# Altium PCB LCL_Filter.PcbDoc
Units mm, origin at the board's own origin, x right, y up, seen from the top; angles counter-clockwise.
Board outline 111.25 x 84.33 mm, 2 copper layers (Top Layer, Bottom Layer), stack 1.639 mm thick; 18 components, 6 nets, 32 pads, 0 vias.
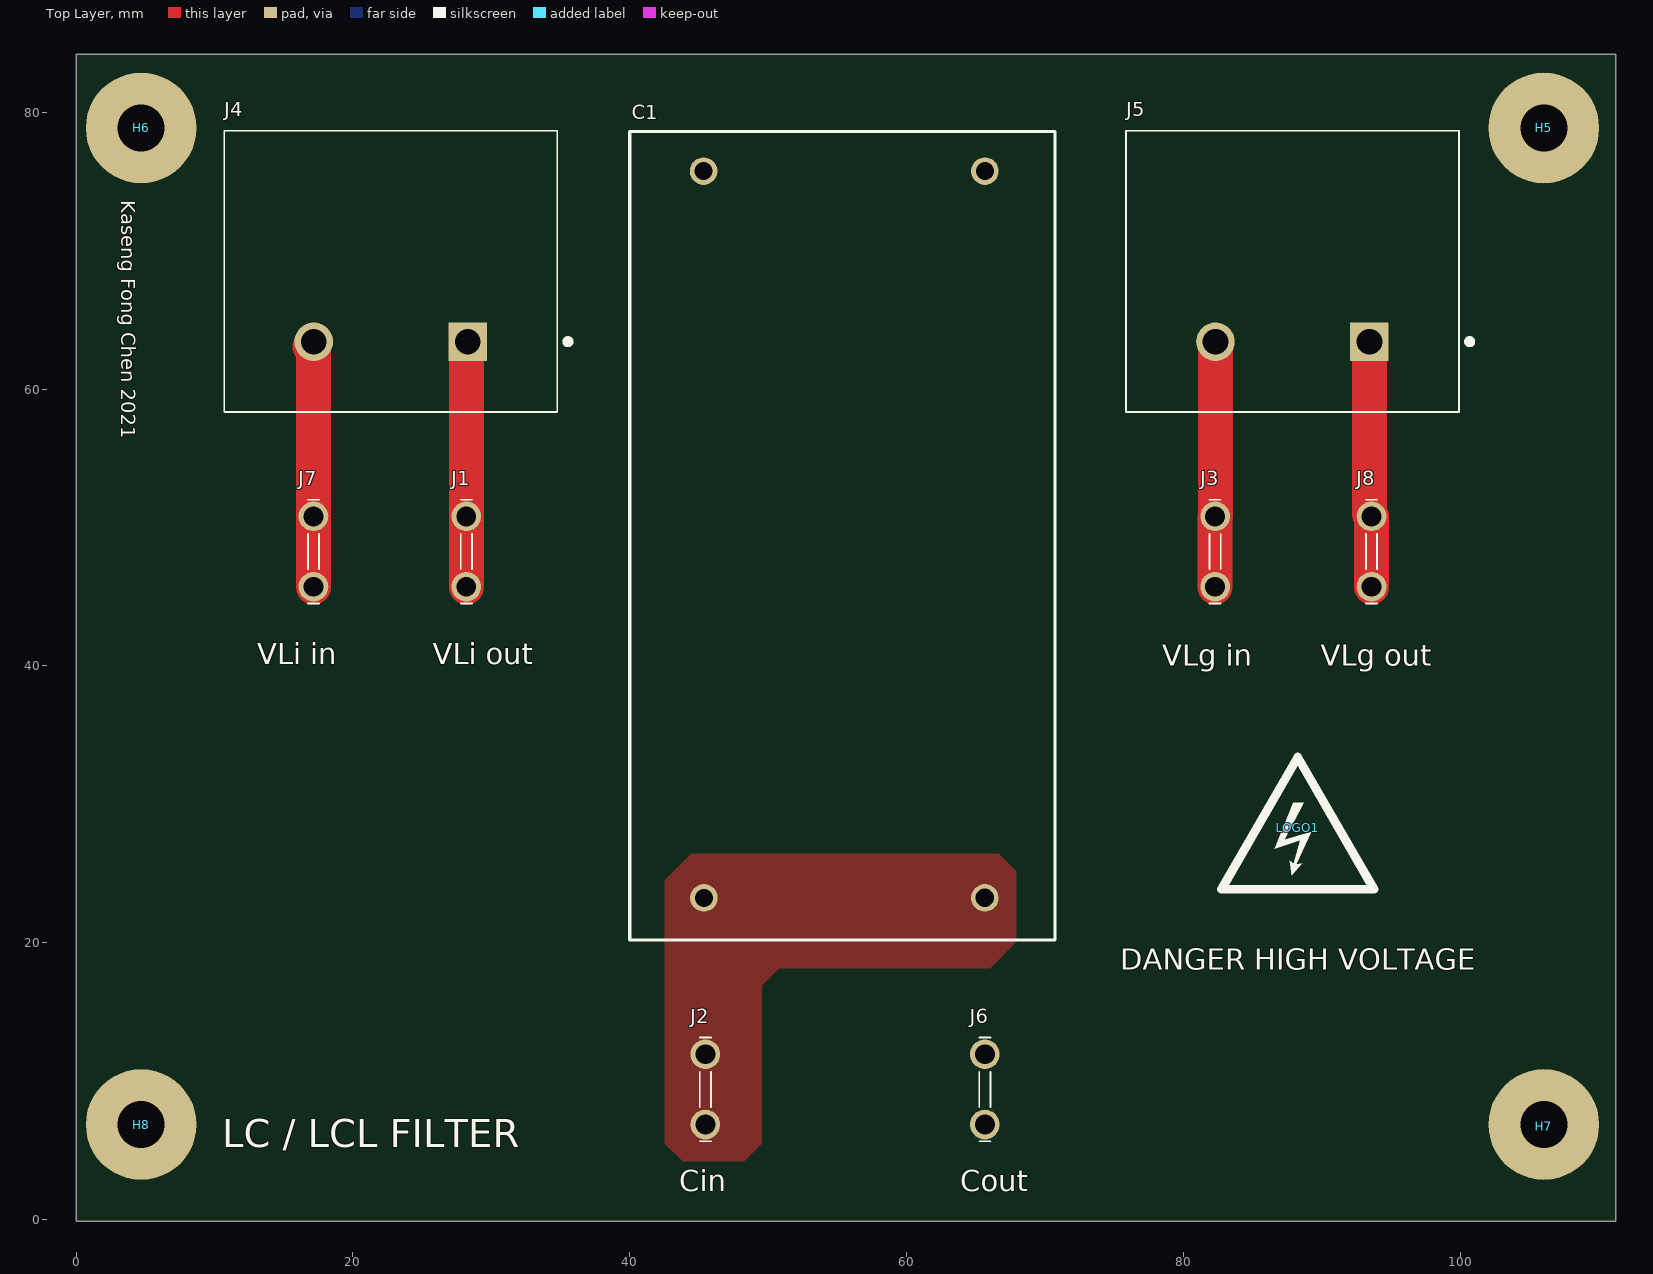
[diagram p0: Top Layer view]
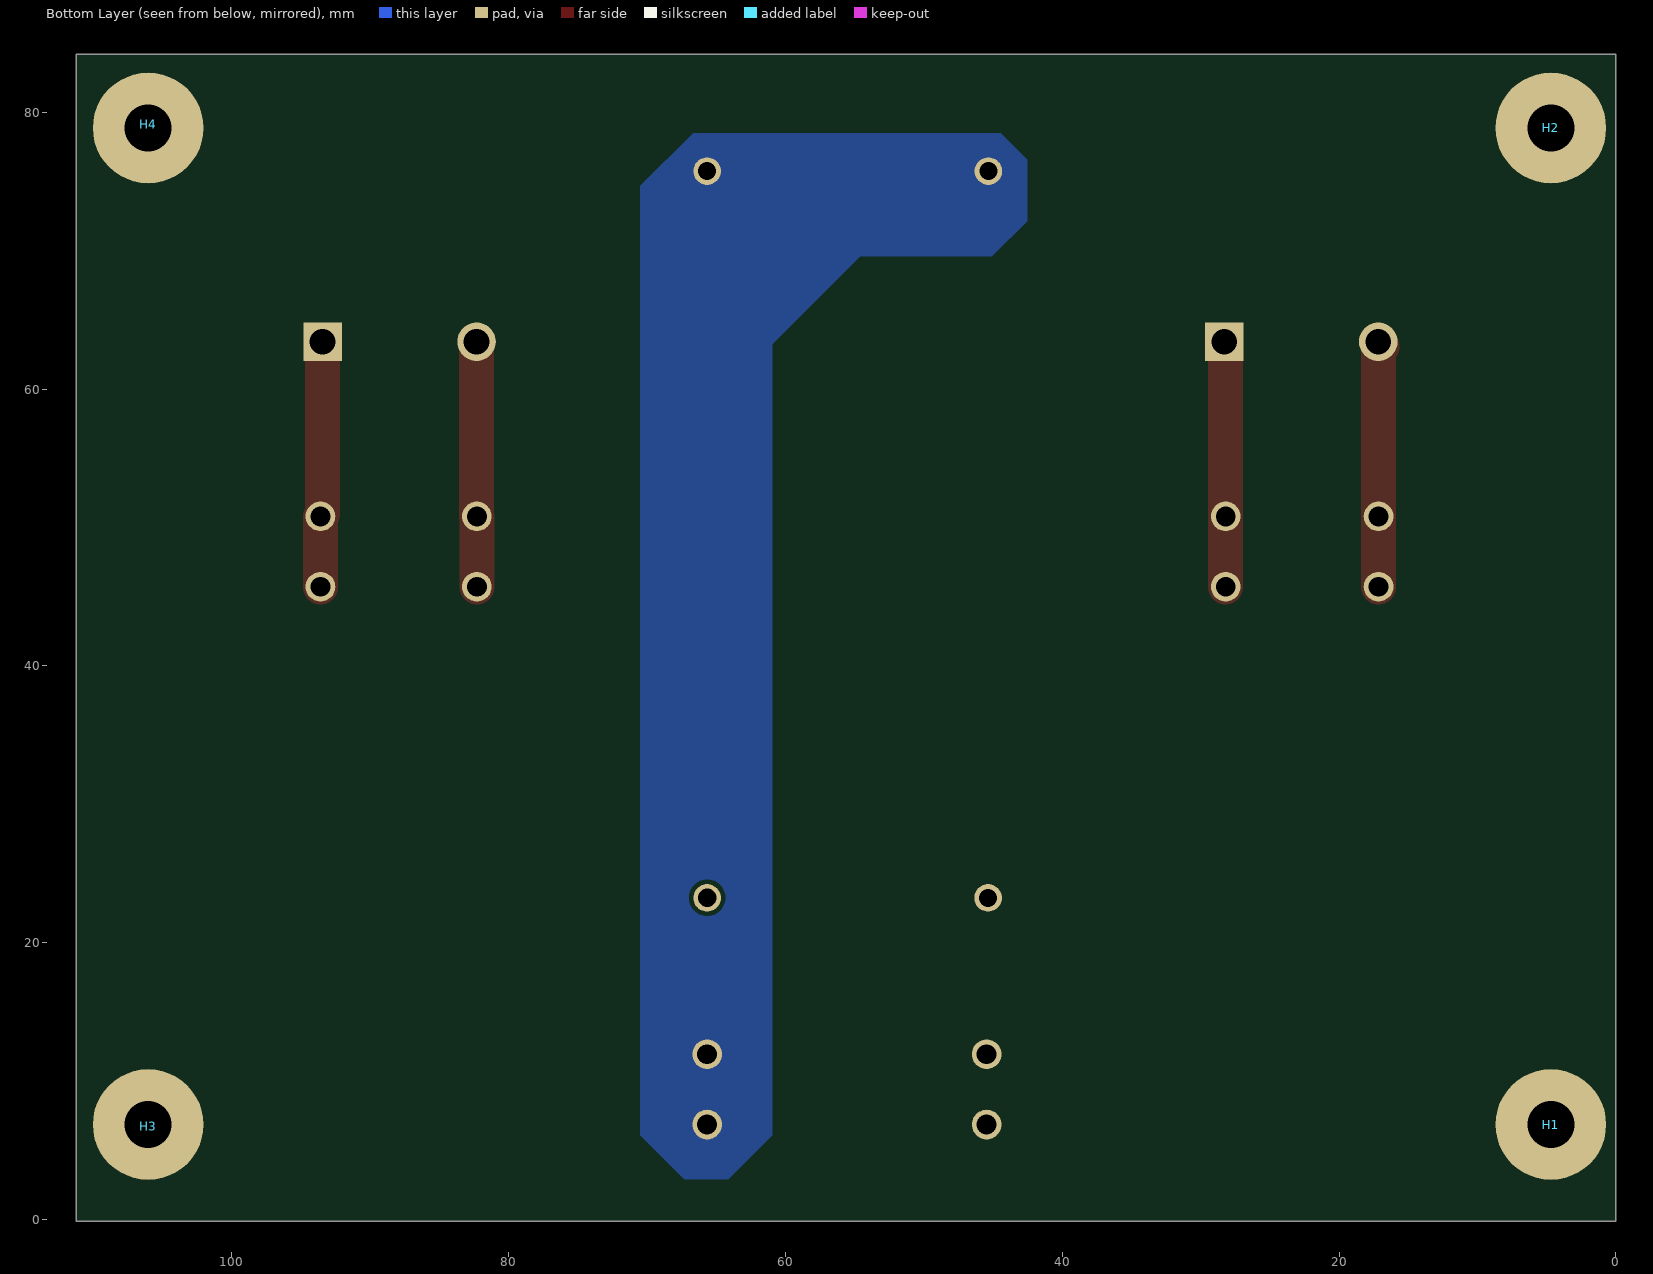
[diagram p1: Bottom Layer view, seen from below]
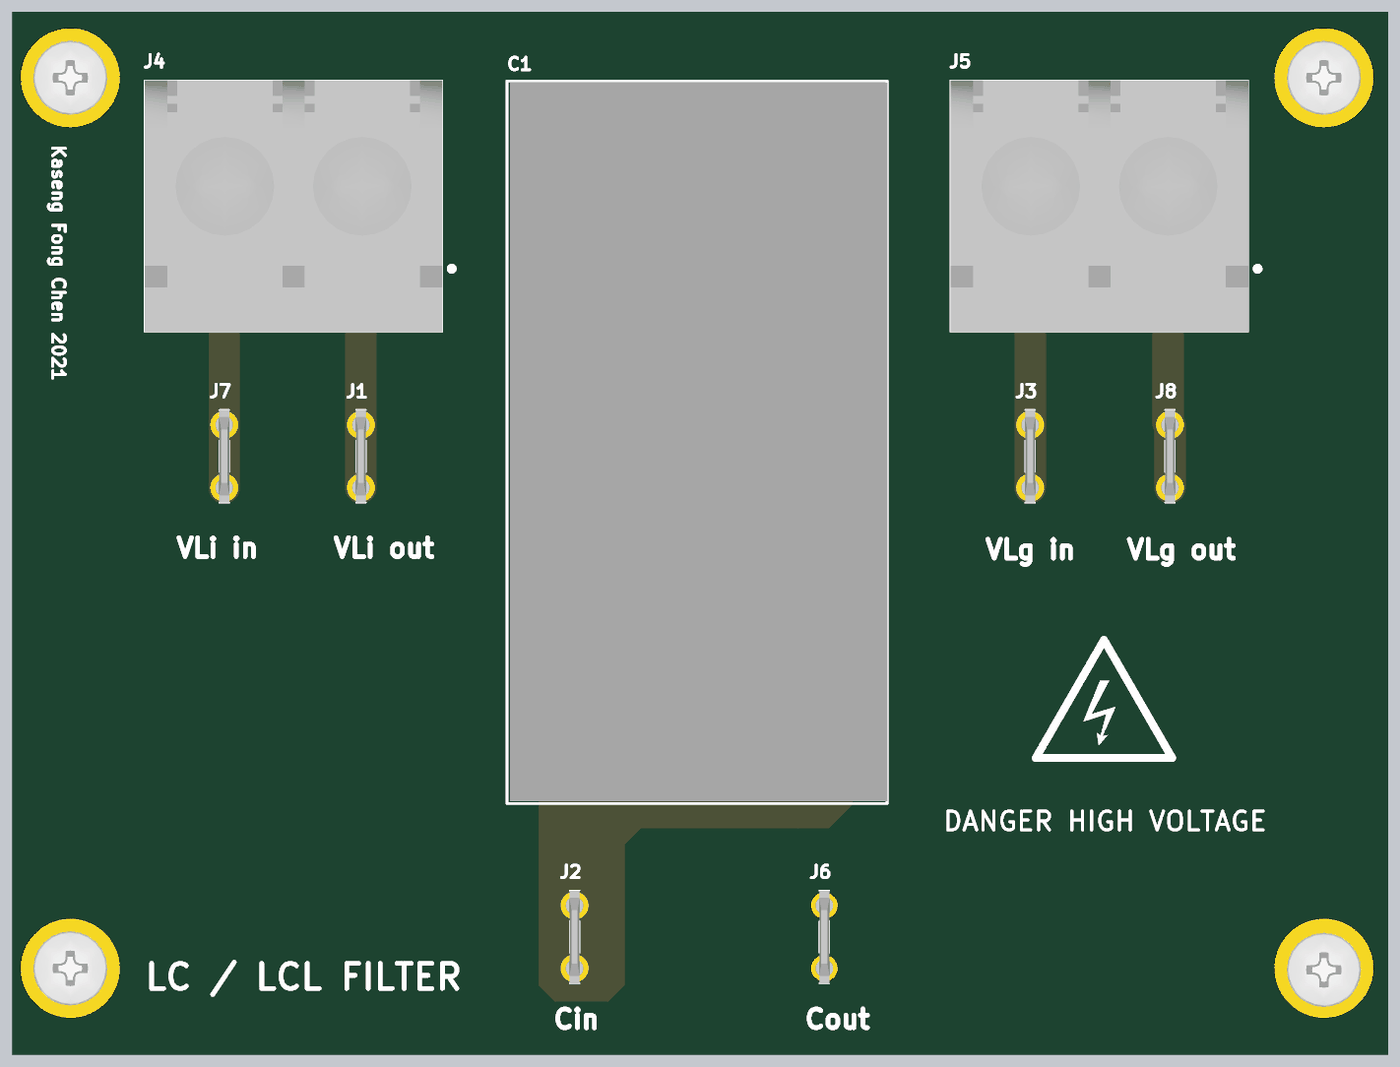
[diagram p2: 3D render of the assembled board from above, using the file's embedded part models]

## Layer stack, top to bottom
Top Solder: solder mask 0.0102, Solder Resist, Dk 3.5
Top Layer: signal copper 0.07
Dielectric 1: core 1.4986, FR-4, Dk 4.8
Bottom Layer: signal copper 0.07
Bottom Solder: solder mask 0.0102, Solder Resist, Dk 3.5

## Board outline
0,-0.127 111.252,-0.127 111.252,84.201 0,84.201

## Design rules (kind name [scope] priority, off if disabled: settings)
AcuteAngle [All] p1: minimum=4.50000000000000E+0001 checktracksonly=FALSE
AssemblyTestPointUsage [All] p1: valid=2
BoardOutlineClearance BoardOutlineClearance_MountingHoles [OnCopper and InComponentClass('Mounting Holes')] p1: gap=1.016 ignorepadtopadclearanceinfootprint=FALSE
BoardOutlineClearance BoardOutlineClearance_Poly [OnCopper and IsPoly] p2: gap=0.635 ignorepadtopadclearanceinfootprint=FALSE
BoardOutlineClearance [OnCopper and Not InComponentClass('Logo') and not InComponentClass('FiducialMark') and not InRegion(1000,500,4000,800) and not InPoly] p3: gap=0 ignorepadtopadclearanceinfootprint=FALSE
Clearance Clearance_MH [InPadClass('mh')] p1: gap=1.5 ignorepadtopadclearanceinfootprint=FALSE except(0: Arc-Hole Track-Hole SMDPad-Hole THPad-Hole Via-Hole Fill-Hole Poly-Hole Region-Hole Text-Hole)
Clearance Clearance_HV_Bottom_Layer [InLayerClass('Bottom_Layer') and InPolygon vs InNetClass('HV_Class')] p2: gap=3 ignorepadtopadclearanceinfootprint=FALSE except(0: Arc-Hole Track-Hole SMDPad-Hole THPad-Hole Via-Hole Fill-Hole Poly-Hole Region-Hole Text-Hole)
Clearance Clearance_HV_TOP_Layer [InLayerClass('Top_Layer') and InPolygon vs InNetClass('HV_Class')] p3: gap=3 ignorepadtopadclearanceinfootprint=FALSE except(0: Arc-Hole Track-Hole SMDPad-Hole THPad-Hole Via-Hole Fill-Hole Poly-Hole Region-Hole Text-Hole)
Clearance Clearance_HV_PwrLayer [InLayerClass('PWR Class') and InPolygon vs InNetClass('HV_Class')] p4: gap=3 ignorepadtopadclearanceinfootprint=FALSE except(0: Arc-Hole Track-Hole SMDPad-Hole THPad-Hole Via-Hole Fill-Hole Poly-Hole Region-Hole Text-Hole)
Clearance Clearance_HV_GndLayer [InLayerClass('GND_Layer') and InPolygon vs InNetClass('HV_Class')] p5: gap=1.524 ignorepadtopadclearanceinfootprint=FALSE except(0: Arc-Hole Track-Hole SMDPad-Hole THPad-Hole Via-Hole Fill-Hole Poly-Hole Region-Hole Text-Hole)
Clearance "Clearance_Poly to Poly" [InPoly vs InPoly] p6: gap=0.635 ignorepadtopadclearanceinfootprint=FALSE except(0: Arc-Hole Track-Hole SMDPad-Hole THPad-Hole Via-Hole Fill-Hole Poly-Hole Region-Hole Text-Hole)
Clearance Clearance_Poly [InPolygon] p7: gap=0.305 ignorepadtopadclearanceinfootprint=FALSE except(0: Arc-Hole Track-Hole SMDPad-Hole THPad-Hole Via-Hole Fill-Hole Poly-Hole Region-Hole Text-Hole)
Clearance [All] p8: gap=0.2 ignorepadtopadclearanceinfootprint=FALSE except(0: Arc-Hole Track-Hole SMDPad-Hole THPad-Hole Via-Hole Fill-Hole Poly-Hole Region-Hole Text-Hole)
ComponentClearance ComponentClearance_MountingHoles_FiducialMarks [InComponentClass('Mounting Holes') vs InComponentClass('FiducialMark')] p1: gap=0.762 collisioncheckmode=3 verticalgap=0.254 showdistances=FALSE
ComponentClearance ComponentClearance_Shunt [InComponentClass('Header') vs InComponentClass('Shunt')] p2: gap=0 collisioncheckmode=3 verticalgap=0 showdistances=FALSE
ComponentClearance ComponentClearance_Logo [InComponentClass('Logo')] p3: gap=0.025 collisioncheckmode=3 verticalgap=0.025 showdistances=FALSE
ComponentClearance ComponentClearance_ScrewToNut [(HasFootprint('NY PMS 440 0025 PH')) vs (HasFootprint('Keystone_1902C'))] p4: gap=0.025 collisioncheckmode=3 verticalgap=0.025 showdistances=FALSE
ComponentClearance ComponentClearance_MountingHoles [InComponentClass('Mounting Holes')] p5: gap=0.762 collisioncheckmode=3 verticalgap=2540 showdistances=FALSE
ComponentClearance ComponentClearance_SmallPassives [HasFootprint('0201*') or HasFootprint('0402*') or HasFootprint('0508') or HasFootprint('0603*') or HasFootprint('0612') or HasFootprint('0805*') or HasFootprint('0815*') or HasFootprint('0830*') or HasFootprint('1206*') or HasFootprint('1210*') or HasFootprint('1808*') or HasFootprint('1812*') or HasFootprint('1825*') or HasFootprint('2010*') or HasFootprint('2220*') or HasFootprint('2225*') or HasFootprint('2512*') or HasFootprint('2728*') or HasFootprint('3518*') vs HasFootprint('0201*') or HasFootprint('0402*') or HasFootprint('0508') or HasFootprint('0603*') or HasFootprint('0612') or HasFootprint('0805*') or HasFootprint('0815*') or HasFootprint('0830*') or HasFootprint('1206*') or HasFootprint('1210*') or HasFootprint('1808*') or HasFootprint('1812*') or HasFootprint('1825*') or HasFootprint('2010*') or HasFootprint('2220*') or HasFootprint('2225*') or HasFootprint('2512*') or HasFootprint('2728*') or HasFootprint('3518*')] p6: gap=0 collisioncheckmode=3 verticalgap=0 showdistances=FALSE
ComponentClearance ComponentClearance_THtoSMT [IsThruComponent vs IsSMTComponent] p7: gap=0 collisioncheckmode=3 verticalgap=0 showdistances=FALSE
ComponentClearance ComponentClearance_THtoTH [IsThruComponent vs IsThruComponent] p8: gap=0 collisioncheckmode=3 verticalgap=0 showdistances=FALSE
ComponentClearance [All] p9: gap=0 collisioncheckmode=3 verticalgap=0 showdistances=FALSE
DiffPairsRouting [All] p1: maxlimit=0.254 minlimit=0.2 mostfreqgap=0.2 toplayer_minwidth=0.254 toplayer_maxwidth=0.254 toplayer_prefwidth=0.254 bottomlayer_minwidth=0.254 bottomlayer_maxwidth=0.254 bottomlayer_prefwidth=0.254 maxuncoupledlength=25.4
FabricationTestPointUsage TestPointUsage [All] p1: valid=2 allowmultiple=FALSE
FabricationTestpoint Testpoint [All] p1: side=3 testpointundercomponent=TRUE minsize=1.016 maxsize=2.54 preferedsize=1.524 minholesize=0 maxholesize=1.016 preferedholesize=0.813 testpointgrid=0.025 allowsidetop=TRUE allowsidebottom=TRUE usegrid=TRUE gridtolerance=0
FanoutControl Fanout_LCC [IsLCC] p1: bgadir=Out bgaviamode=Centered fanoutstyle=Auto fanoutdirection=Alternating viagrid=0.025 // Fanout_LCC (Default Rule)
FanoutControl Fanout_BGA [IsBGA] p2: bgadir=Out bgaviamode=Centered fanoutstyle=Auto fanoutdirection=Alternating viagrid=0.025 // Fanout_BGA (Default Rule)
FanoutControl Fanout_Default [All] p4: bgadir=Out bgaviamode=Centered fanoutstyle=Auto fanoutdirection=Alternating viagrid=0.025 // Fanout_Default (Default Rule)
FanoutControl Fanout_Small [(CompPinCount < 5)] p5: bgadir=Out bgaviamode=Centered fanoutstyle=Auto fanoutdirection=OutThenIn viagrid=0.025 // Fanout_Small (Default Rule)
Height [All] p1: minheight=0 maxheight=63.5 prefheight=12.7
HoleSize [All] p1: absolutevalues=TRUE maxlimit=25.4 minlimit=0.2 maxpercent=80.000 minpercent=20.000
MinimumAnnularRing MinimumAnnularRing_ThermalPadVias [IsVia and InAnyComponent] p1: minimumring=0.15
MinimumAnnularRing [All] p2: minimumring=0.14
MinimumSolderMaskSliver MinimumSolderMaskSliver_Logo [InComponentClass('Logo') vs InComponentClass('Logo')] p1: minsoldermaskwidth=0.018
MinimumSolderMaskSliver [All] p2: minsoldermaskwidth=0.1
PlaneConnect [All] p1: planeconnectstyle=Direct reliefexpansion=0.254 reliefentries=4 reliefconductorwidth=0.254 reliefairgap=0.254
PolygonConnect [All] p1: connectstyle=Direct reliefconductorwidth=0.254 reliefentries=4 polygonreliefangle="90 Angle" airgapwidth=0.254
RoutingVias ThermalPadVias [IsVia and InAnyComponent] p1: holewidth=0.2 width=0.5 viastyle="Through Hole" minholewidth=0.2 minwidth=0.5 maxholewidth=0.33 maxwidth=0.6
RoutingVias [All] p2: holewidth=0.406 width=0.813 viastyle="Through Hole" minholewidth=0.305 minwidth=0.61 maxholewidth=0.711 maxwidth=1.321
SilkToSilkClearance SilkToSilkClearance_Pb-FreeLogo [(HasFootprint('Pb-Free_Overlay_Medium') OR HasFootprint('Pb-Free_Overlay_Small')) vs (HasFootprint('Pb-Free_Overlay_Medium') OR HasFootprint('Pb-Free_Overlay_Small'))] p1: silktosilkclearance=0
SilkToSilkClearance [All] p2: silktosilkclearance=0.102
SilkToSolderMaskClearance SilkToComponentPadClearance [(IsPad or IsFill or IsRegion) and InAnycomponent] p1: minsilkscreentomaskgap=0.127 clearancetoexposedcopper=TRUE
SilkToSolderMaskClearance "Silk to Solder Mask Opening" [All] p2: minsilkscreentomaskgap=0.102 clearancetoexposedcopper=FALSE
SolderMaskExpansion [All] p1: expansion=0.05 istentingtop=FALSE
Width [All] p1: maxlimit=2.54 minlimit=0.229 preferedwidth=0.508 checkconnectedcopper=TRUE
15 further rules are at their usual default settings.

## Components (designator, comment, footprint, x,y, rotation, side; value= is the part's Value field where it differs from the comment)
C1 "C4AF3BW5100A3MK" "C4AF Capacitors" 65.659,23.241 r90 top
H1 "24438" Keystone24438 4.699,6.858 r0 bottom
H2 "24438" Keystone24438 4.699,78.867 r0 bottom
H3 "24438" Keystone24438 106.045,6.731 r0 bottom
H4 "24438" Keystone24438 106.045,79.121 r0 bottom
H5 "MPMS 003 0005 PH" BuildingFastener_MPMS_003_0005_PH 106.045,78.867 r180 top
H6 "MPMS 003 0005 PH" BuildingFastener_MPMS_003_0005_PH 4.699,78.867 r180 top
H7 "MPMS 003 0005 PH" BuildingFastener_MPMS_003_0005_PH 106.045,6.731 r180 top
H8 "MPMS 003 0005 PH" BuildingFastener_MPMS_003_0005_PH 4.699,6.858 r180 top
J1 "Faston  .250" TE_62409-1 28.194,48.26 r270 top
J2 "Faston  .250" TE_62409-1 45.466,9.398 r270 top
J3 "Faston  .250" TE_62409-1 82.296,48.26 r270 top
J4 "2P Terminal,  12-20  AWG" TE_8PCV-02-006 22.733,63.424 r180 top
J5 "2P Terminal,  12-20  AWG" TE_8PCV-02-006 87.884,63.424 r180 top
J6 "Faston  .250" TE_62409-1 65.659,9.398 r270 top
J7 "Faston  .250" TE_62409-1 17.145,48.26 r270 top
J8 "Faston  .250" TE_62409-1 93.599,48.26 r270 top
LOGO1 "DANGER HIGH VOLTAGE" IEC_HighVoltage_Medium 88.265,28.321 r0 top

## Footprints (in the part's own frame and the unit in brackets; to place one, negate y for a bottom-side part, rotate by r counter-clockwise, add the part's x,y. Pads: shape width x height; smd on the part's side, far side on the other; paste and mask are expansions set on the pad)
BuildingFastener_MPMS_003_0005_PH [mil] "MACHINE SCREW PAN PHILLIPS M3"
  round 1 on Mech3: 0(0,0)
  body extent -118,-118 118,118, height 93
"C4AF Capacitors" [mm]
  round 2 hole 1.3 paste+0 mask+0: 1(0,20.3) 2(52.5,0) 2(52.5,20.32)
  round 2 hole 1.35 paste+0 mask+0: 1(0,0)
  silkscreen extent -3.05,-5.08 55.37,25.65, body extent -2.89,-5.11 55.21,25.4, height 45.31
IEC_HighVoltage_Medium [mm]
  silkscreen extent -5.51,-4.46 5.51,5.09
Keystone24438 [mil] "Standoff, Aluminium, M3x0.5mm, L 25 mm"
  round 1 on Mech3: 0(0,0)
  body extent -98,-114 98,114, height 984
TE_8PCV-02-006 [mil]
  rect 109.5x109.5 hole 73: 1(-219,0)
  round 109.5 hole 73: 2(219,0)
  silkscreen extent -512,-600 474,200, body extent -474,-600 474,200, height 770
TE_62409-1 [mm]
  round 2.145 hole 1.43: 1(-2.54,0) 1(2.54,0)
  silkscreen extent -3.75,-0.4 3.75,0.4, body extent -3.75,-0.4 3.75,0.4, height 12.64

## Part data
C1: "Cap Film 10uF 800V PP 10% (57.5 X 30 X 45mm) Radial 52.5mm 105°C Bulk", Manufacturer=KEMET, Supplier Part Number 1=399-17837-ND, Category="Film Capacitors", Manufacturer Part Number=C4AF3BW5100A3MK, Pricing 1="1=9,21000, 10=8,18900, 50=7,16540, 100=6,55120, 500=5,73230 (USD)", RoHS=Yes, RoHS Compliant=Yes, Stock 1=162, Supplier 1=Digi-Key
H1 H2 H3 H4: library part CMP-0003640-1, "Standoff, Hex,25mm Length, M3, Aluminum", Manufacturer=Keystone, Supplier Part Number 1=36-24438-ND, ComponentLink1Description="Datasheet Link", ComponentLink1URL=http://www.keyelco.com/userAssets/file/M60-2p72.pdf, CompType=Hardware, Key=24438, LatestRevisionDate=2017-03-09, MountType=TH, PackageReference="Standoff M3", PartNumber=24438, Publisher="Texas Instruments", RoHS=Y, Supplier 1=Digi-Key, Supplier 2=Mouser, Supplier Part Number 2=534-24438
H5 H6 H7 H8: library part CMP-0003646-1, "MACHINE SCREW PAN PHILLIPS M3 5mm", Manufacturer="B&F Fastener Supply", Supplier Part Number 1=H742-ND, ClassName=Screw, ComponentLink1Description="Datasheet Link", ComponentLink1URL=http://www.fasnetdirect.com/refguide/MetD7985a.pdf, CompType=Hardware, Key="MPMS 003 0005 PH", LatestRevisionDate=2017-03-09, MountType=N/A, PackageReference="Screw M3 Phillips head", PartNumber="MPMS 003 0005 PH", Publisher="Texas Instruments", RoHS=Y, Supplier 1=Digi-Key
J1 J2 J3 J6 J7 J8: library part 62409-1, "Quick Disconnect Terminal M 15.8mm 7.5mm Tin Over Copper Automotive Bag", Manufacturer="AMP - TE CONNECTIVITY", Supplier Part Number 1=26AC8417, ComponentLink1Description=http://www.farnell.com/datasheets/1650963.pdf?src-supplier=Farnell, ComponentLink1URL=http://www.farnell.com/datasheets/1650963.pdf?src-supplier=Farnell, ComponentLink2Description=http://www.farnell.com/datasheets/1650963.pdf?src-supplier=Element14, ComponentLink2URL=http://www.farnell.com/datasheets/1650963.pdf?src-supplier=Element14, ComponentLink3Description=http://www.farnell.com/datasheets/1650963.pdf?src-supplier=Newark, ComponentLink3URL=http://www.farnell.com/datasheets/1650963.pdf?src-supplier=Newark, ComponentLink4Description=https://www.te.com/commerce/DocumentDelivery/DDEController?Action=srchrtrv&DocNm=62409&DocType=Customer+Drawing&DocLang=English&src-supplier=Digi-Key, ComponentLink4URL=https://www.te.com/commerce/DocumentDelivery/DDEController?Action=srchrtrv&DocNm=62409&DocType=Customer+Drawing&DocLang=English&src-supplier=Digi-Key, Manufacturer Part Number=62409-1, Pricing 1="1=0,19000, 10=0,17800, 25=0,15200, 50=0,13320, 100=0,12360, 250=0,10936, 750=0,09035, 1500=0,08083, 8000=0,06895 (USD)", RoHS=No, Stock 1=8729, Supplier 1=Newark
J4 J5: library part 8PCV-02-006, "Barrier Terminal Blocks VERTICAL RAISED 2P", Color=Black, Current Rating=30A, Flammability Rating="UL94 V-0", Manufacturer="TE Connectivity", Max Operating Temperature=248°C, Max Voltage Rating (AC)=600V, Min Operating Temperature=-40°C, Package Quantity=270, Supplier Part Number 1=A98460-ND, Category="Terminal Blocks", ComponentLink1Description=https://datasheet.ciiva.com/30214/8pcv02006-30214903.pdf?src-supplier=Onlinecomponents.com, ComponentLink1URL=https://datasheet.ciiva.com/30214/8pcv02006-30214903.pdf?src-supplier=Onlinecomponents.com, ComponentLink2Description=https://datasheet.ciiva.com/11746/0900766b80fa362c-11746107.pdf?src-supplier=RSComponents, ComponentLink2URL=https://datasheet.ciiva.com/11746/0900766b80fa362c-11746107.pdf?src-supplier=RSComponents, ComponentLink3Description=https://datasheet.ciiva.com/5181/eng-cd-6-1437657-3-k4-5181165.pdf?src-supplier=Mouser, ComponentLink3URL=https://datasheet.ciiva.com/5181/eng-cd-6-1437657-3-k4-5181165.pdf?src-supplier=Mouser, Contact Material="Copper Alloy", Contact Plating=Tin, Depth=0.77inch, ELV=Compliant, Height=0.77inch, Housing Material=Thermoplastic, Insulation Material=Thermoplastic, Length=24.07mm, Manufacturer Part Number=8PCV-02-006, Material=Thermoplastic, Max Current Rating=30A, Mount="Through Hole", Mounting Ears="No (Without)", Mounting Insert="No (Without)", Number of Circuits=2, Number of Contacts=2, Number of Levels=1, Number of Positions=2, Number of Rows=1, Number of Wire Entries=2, Orientation=Straight, Pitch=11.1mm, Pricing 1="1=1,84000, 10=1,29200, 25=1,20480, 50=1,09360, 100=1,08880, 250=0,91940, 500=0,87102, 1000=0,77424, 5000=0,62907 (USD)", RoHS=Yes, RoHS Compliant=Yes, Series="#8, Buchanan", Stock 1=4811, Supplier 1=Digi-Key, Terminal Material="Copper Alloy", Termination=Screw, Thread Size=M4, Voltage=600V, Voltage Rating=600V, Width=0.8inch, Wire Gauge (Max)=18AWG, Wire Gauge (Min)=10AWG, Wire/Cable Gauge=10AWG
LOGO1: library part CMP-0074835-1, "IEC 61010-1 High Voltage Warning", LatestRevisionDate=2017-07-06, Lib Reference=IEC_HighVoltage, PartNumber="DANGER HIGH VOLTAGE", Published=2009-03-03, Publisher="Texas Instruments", SymbolCreator=a0412235, SymbolVersion=2011-08-22

## Free pads (board coordinates)
  round 8 hole 3.4: 1(4.699,6.858) 1(4.699,78.867) 1(106.045,6.858) 1(106.045,78.867)

## Nets (pads, with @x,y where several pads share a name; then routed paths per layer and width w, separated by ;. In a path a pad name is that pad's centre, name@x,y a point inside that pad or via, vN(x,y) a via of type N, cw(c..) or ccw(c..) an arc to the next point about the centre after c; other vN are vias at no path point)
GND: C1.2 J6.1
NetC1_1: C1.1 J2.1
NetJ1_1: J1.1 J4.1 | length 17.7
  Top Layer w2.54: J1.1@28.194,45.72 28.194,63.322 J4.1
NetJ3_1: J3.1 J5.2 | length 17.7
  Top Layer w2.54: J3.1@82.296,45.72 82.296,50.8 82.321,50.825 J5.2
NetJ4_2: J4.2 J7.1 | length 17.8
  Top Layer w2.54: J4.2@16.891,63.079 17.17,63.359 J4.2 ; J7.1@17.145,45.72 J4.2@17.145,63.079
NetJ5_1: J5.1 J8.1 | length 17.8
  Top Layer w2.54: J5.1 93.447,50.952 93.599,50.8 J8.1@93.599,45.72
pads on no net: H1.0 H2.0 H3.0 H4.0 H5.0 H6.0 H7.0 H8.0

## Polygon pours and split planes (outlines as drawn)
NetC1_1 on Top Layer "NETC1_1_L01_P000" (solid, pour order 0): 42.545,24.511 44.45,26.416 66.675,26.416 67.945,25.146 67.945,20.066 66.04,18.161 50.8,18.161 49.53,16.891 49.53,5.461 48.26,4.191 43.815,4.191 42.545,5.461
GND on Bottom Layer "GND_L02_P001" (solid, pour order 1): 42.545,76.581 44.45,78.486 66.675,78.486 70.485,74.676 70.485,6.096 67.31,2.921 64.135,2.921 60.96,6.096 60.96,63.246 54.61,69.596 45.085,69.596 42.545,72.136

## Silkscreen, mask and mechanical layers (free items; w line width, h text height)
Top Overlay:
  text "Kaseng Fong Chen 2021" at 3.26,73.66 h1.02 r270
  text "VLi in" at 13.081,40.132 h1.52
  text "VLi out" at 25.781,40.132 h1.52
  text "VLg in" at 78.486,40.005 h1.52
  text "VLg out" at 89.916,40.005 h1.52
  text "LC / LCL FILTER" at 10.541,5.207 h2.03
  text "Cin" at 43.561,2.032 h1.52
  text "Cout" at 63.881,2.032 h1.52